# EAGLE board fbri_flight_straight (EAGLE 6.6.0)
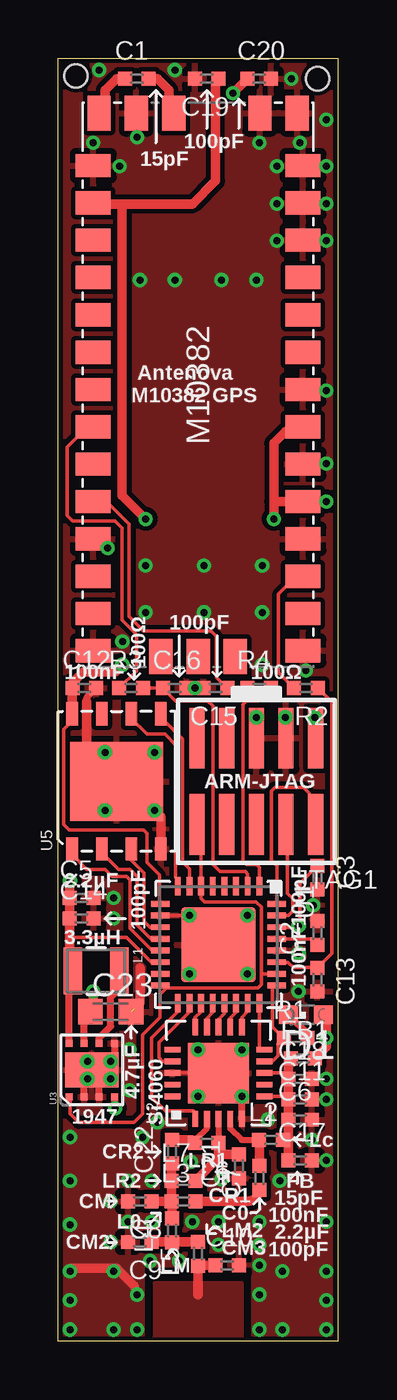
[diagram p0: board, top side]
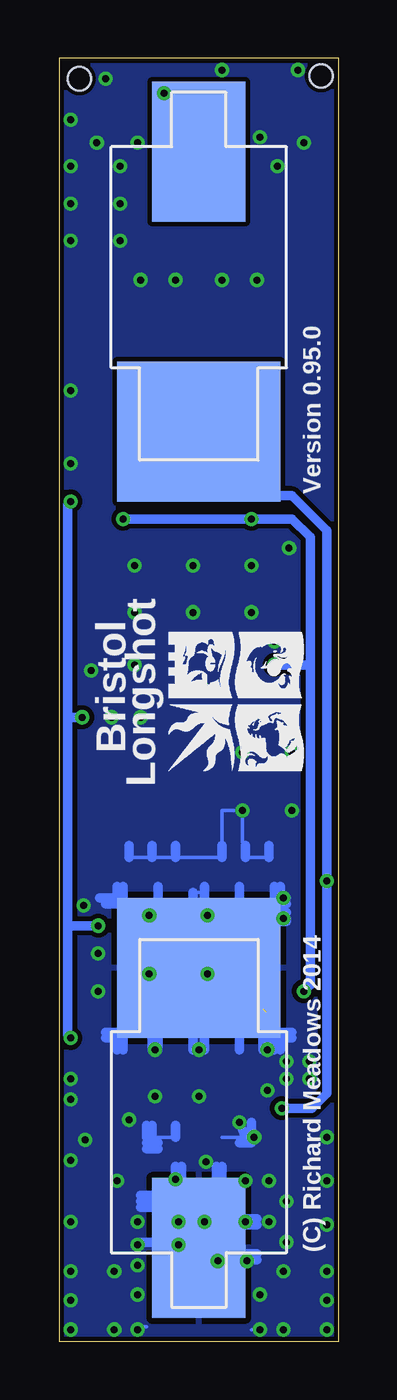
[diagram p1: board, bottom side, seen from below]

Size 12 x 55 mm. Coordinates in mm from the lower left corner, seen from the top.
Outline: 0,0 0,55 12,55 12,0 0,0
Copper layers (1*16): Top 0.035mm / dielectric 1.5mm / Bottom 0.035mm
Design rules "hackvana": minimum track width 6mil, minimum drill 0.3mm, track to track 6mil, track to pad 6mil, pad to pad 6mil, via to via 6mil, smd to smd 0mil, copper to edge 6mil, drill to drill 6mil, minimum pad ring 10mil, minimum via ring 6mil, stop-mask expansion 2mil, vias tented up to drill 100mil, thermal gap 10mil
Holes 1 mm at 11.12,54.12 0.75,54.25

## Footprints (pad centres in the part's own frame; a part is rotated, then mirrored left to right if it is on the bottom)
_0402 = smd 0.6 x 0.6: 1 -0.508,0; 2 0.508,0
C0603K = smd 1.05 x 1.08: 1 -0.875,0; 2 0.875,0
CHIPLED_0603 = smd 0.8 x 0.8: A 0,-0.75; C 0,0.75
2X05_1.27MM_SMT = smd 0.65 x 2.6: 1 -2.54,-1.85; 2 -2.54,1.85; 3 -1.27,-1.85; 4 -1.27,1.85; 5 0,-1.85; 6 0,1.85; 7 1.27,-1.85; 8 1.27,1.85; 9 2.54,-1.85; 10 2.54,1.85
1007 = smd 2 x 0.8: 1 0,1; 2 0,-1
QFN32_5MM = smd 0.8 x 0.25: 1 -2.5,1.75; 2 -2.5,1.25; 3 -2.5,0.75; 4 -2.5,0.25; 5 -2.5,-0.25; 6 -2.5,-0.75; 7 -2.5,-1.25; 8 -2.5,-1.75; 17 2.5,-1.75; 18 2.5,-1.25; 19 2.5,-0.75; 20 2.5,-0.25; 21 2.5,0.25; 22 2.5,0.75; 23 2.5,1.25; 24 2.5,1.75 | smd 0.25 x 0.8: 9 -1.75,-2.5; 10 -1.25,-2.5; 11 -0.75,-2.5; 12 -0.25,-2.5; 13 0.25,-2.5; 14 0.75,-2.5; 15 1.25,-2.5; 16 1.75,-2.5; 25 1.75,2.5; 26 1.25,2.5; 27 0.75,2.5; 28 0.25,2.5; 29 -0.25,2.5; 30 -0.75,2.5; 31 -1.25,2.5; 32 -1.75,2.5 | smd 3.2 x 3.2: 33 0,0
QFN20 = smd 0.7 x 0.25: 1 -1.97,1; 2 -1.97,0.5; 3 -1.97,0; 4 -1.97,-0.5; 5 -1.97,-1; 11 1.97,-1; 12 1.97,-0.5; 13 1.97,0; 14 1.97,0.5; 15 1.97,1 | smd 0.25 x 0.7: 6 -1,-1.97; 7 -0.5,-1.97; 8 0,-1.97; 9 0.5,-1.97; 10 1,-1.97; 16 1,1.97; 17 0.5,1.97; 18 0,1.97; 19 -0.5,1.97; 20 -1,1.97 | smd 2.6 x 2.6: PAD 0,0
TDFN8 = smd 0.3 x 0.3: 1 -1.15,0.975; 2 -1.15,0.325; 3 -1.15,-0.325; 4 -1.15,-0.975; 5 1.15,-0.975; 6 1.15,-0.325; 7 1.15,0.325; 8 1.15,0.975 | smd 1.5 x 2.3: PAD 0,0
ANTENOVA_GPS_M10382 = smd 1 x 1.5: 1_ANT_IN -1.05,11.65; 2_GND -2.65,11.65; 3_ANT_OUT -4.25,11.65; 18_SDA -1.6,-11.65; 19_SCL 0,-11.65; 20_SAFEBOOT_N/TDI 1.6,-11.65; 35_GND 4.25,11.65; 36_GND 2.65,11.65 | smd 1.5 x 1: 4_GND -4.5,9.4; 5_VIO -4.5,7.8; 6_USB_DP -4.5,6.2; 7_USB_DM -4.5,4.6; 8_SO -4.5,3; 9_CFG_GPS0_SCK -4.5,1.4; 10_SPI_SELECT -4.5,-0.2; 11_TX -4.5,-1.8; 12_V_TH -4.5,-3.4; 13_RX -4.5,-5; 14_GND -4.5,-6.6; 15_V_BCKUP -4.5,-8.2; 16_SI -4.5,-9.8; 17_GND -4.5,-11.4; 21_GND 4.5,-11.4; 22_TCK 4.5,-9.8; 23_TIMEPULSE/TDO 4.5,-8.2; 24_GND 4.5,-6.6; 25_VDD_RF 4.5,-5; 26_GND 4.5,-3.4; 27_VCC 4.5,-1.8; 28_GND 4.5,-0.2; 29_EXT_INTERRUPT 4.5,1.4; 30_V_EN 4.5,3; 31_CFG 4.5,4.6; 32_VDD_USB 4.5,6.2; 33_GND 4.5,7.8; 34_GND 4.5,9.4
WSON8 = smd 1 x 0.5: 1 -2.9,1.905; 2 -2.9,0.635; 3 -2.9,-0.635; 4 -2.9,-1.905; 5 2.9,-1.905; 6 2.9,-0.635; 7 2.9,0.635; 8 2.9,1.905 | smd 3.4 x 4: PAD 0,0
AA = smd 4 x 6: +1 0,23.5; -1 0,-23.5 | smd 7 x 6: +2 0,11.5; -2 0,-11.5

## Placement (x,y rotation side)
C1  15pF  [_0402]  3.38,54.12 0 top
C2  100nF  [_0402]  11.12,17.5 90 top
C3  100nF  [_0402]  11.12,19.88 270 top
C5  2.2µF  [_0402]  1,19 0 top
C6  2.2µF  [_0402]  10.38,9.5 0 top
C7  15pF  [_0402]  8.62,7 90 top
C8  8.2pF  [_0402]  3.5,6 180 top
C9  15pF  [_0402]  3.5,4.25 180 top
C10  8.2pF  [_0402]  7.25,3.25 0 top
C11  100nF  [_0402]  10.38,10.38 0 top
C12  100nF  [_0402]  1.12,28 0 top
C13  100pF  [_0402]  11.12,15.5 270 top
C14  100pF  [_0402]  1,18.12 0 top
C15  100pF  [_0402]  6.75,28 180 top
C16  100pF  [_0402]  5,28 0 top
C17  100pF  [_0402]  10.38,7.75 0 top
C18  15pF  [_0402]  10.38,11.25 0 top
C19  100pF  [_0402]  6.38,54.12 180 top
C20  100pF  [_0402]  8.62,54.12 0 top
C21  15pF  [_0402]  7.75,7.5 90 top
C22  DNP  [_0402]  4.88,8.12 90 top
C23  4.7µF  [C0603K]  2.25,14.12 0 top
D1  GREEN  [CHIPLED_0603]  10.62,14 90 top
FB1  [_0402]  10.5,12.12 0 top
JTAG1  [2X05_1.27MM_SMT]  8.5,24 180 top
L1  3.3µH  [1007]  1.62,15.88 270 top
L2  220nH  [_0402]  9.12,8.62 0 top
L3  56nH  [_0402]  5.38,6 0 top
L4  18nH  [_0402]  4.88,4.75 90 top
L5  18nH  [_0402]  6,3.75 90 top
L6  DNP  [_0402]  6.38,8.5 180 top
L7  DNP  [_0402]  5.38,6.88 0 top
R1  22Ω  [_0402]  10.19,13 0 top
R2  100Ω  [_0402]  10.62,28 180 top
R3  100Ω  [_0402]  3.12,28 0 top
R4  100Ω  [_0402]  8.62,28 0 top
U1  SAM_D20E  [QFN32_5MM]  6.88,17 270 top
U2  SI4060  [QFN20]  6.88,11.5 90 top
U3  MAX1947  [TDFN8]  1.44,11.62 90 top
U4  ANTENOVA_GPS_M10382  [ANTENOVA_GPS_M10382]  6,41 0 top
U5  S25FS-S  [WSON8]  2.5,24 90 top
U$2  AA_HOLDER  [AA]  6,27.5 0 bottom

## Library data of the parts
C1-C3 C5-C22 FB1 JTAG1 L2-L7 R1-R4 = microbuilder_v3
C23 = resistor
D1 = led
L1 = SparkFun
U1-U5 U$2 = fbri

## Nets
1.2V: C5.1 C14.1 L1.2 U1.14 U3.4 U3.8 U$2.+2
1.8V: C3.1 C12.1 C19.1 C23.1 D1.A FB1.2 JTAG1.1 U1.9 U1.30 U3.7 U4.5_VIO U4.25_VDD_RF U4.27_VCC U5.8
AN_GPS_RX: C15.1 R4.1 U4.13_RX
AN_GPS_TX: R3.1 U4.11_TX
ANT: C10.1 L5.1
FILTER1: C8.1 C22.1 L3.1 L4.2 L7.1
FILTER2: C9.1 L4.1 L5.2
GND: C2.2 C3.2 C5.2 C6.2 C8.2 C9.2 C10.2 C11.2 C12.2 C13.2 C14.2 C15.2 C16.2 C17.2 C18.2 C19.2 C20.2 C21.1 C23.2 JTAG1.3 JTAG1.5 U1.10 U1.28 U1.33 U2.5 U2.18 U2.PAD U3.2 U3.3 U3.5 U3.PAD U4.2_GND U4.4_GND U4.14_GND U4.17_GND U4.21_GND U4.24_GND U4.26_GND U4.28_GND U4.32_VDD_USB U4.33_GND U4.34_GND U4.35_GND U4.36_GND U5.4 U5.PAD U$2.-1 U$2.-2
GPS_ANT_IN: C1.2 U4.1_ANT_IN
GPS_ANT_OUT: C1.1 U4.3_ANT_OUT
GPS_RX: R4.2 U1.1
GPS_TX: C16.1 R3.2 U1.2
LED_RES: D1.C R1.2
LX: L1.1 U3.6
MEM_CSN: U1.13 U5.1
MEM_MISO: U1.12 U5.2
MEM_MOSI: U1.7 U5.5
MEM_SCK: U1.8 U5.6
MEM_WPN: U1.11 U5.3
N$1: C20.1 U$2.+1
RADIO_VDD: C6.1 C11.1 C17.1 C18.1 FB1.1 L2.2 U2.6 U2.8
RESETN: JTAG1.10 U1.6 U1.16 U1.26 U3.1
RF_OUT: C7.2 L2.1 U2.4
RXN: C21.2 L6.1 L7.2 U2.3
RXP: C22.2 L6.2 U2.2
SI_GPIO0: R1.1 U1.25 U2.9
SI_GPIO1: U1.24 U2.10
SI_HF_CLK: U1.18 U2.17
SI_MISO: U1.21 U2.13
SI_MOSI: U1.20 U2.14
SI_NIRQ: U1.23 U2.11
SI_NSEL: U1.19 U2.15
SI_SCLK: U1.22 U2.12
SI_SDN: U1.17 U2.1
SWDCLK: JTAG1.4 U1.31
SWDIO: JTAG1.2 U1.32
TANK: C7.1 L3.2
TIME_1KHZ: C13.1 R2.1 U1.27
TIME_1KHZ_DRIVE: R2.2 U4.23_TIMEPULSE/TDO
VDD_CORE: C2.1 U1.29

## Tracks (layer width: path | path; a pad name or v marks a point on that pad's centre or on a via)
1.2V  (via drill 0.3)
  Top 0.152: U1.14 4,16.25 2.94,17.31 0.49,17.31
  Top 0.305: L1.2 0.38,15.62 0.38,15.5 0.5,15.38 0.46,15.34 U3.8 | U3.4 2.41,10.01 v2.44,9.98
  Top 0.406: L1.2 0.49,15.76 0.49,17.31 C14.1 C5.1 v0.49,19.73 v0.5,19.73
  Bottom 0.406: U$2.+2 5.5,39 2.75,36.25 2,36.25 0.5,34.75 v0.5,19.73 0.5,10.62 1.14,9.98 v2.44,9.98
1.8V  (via drill 0.3)
  Top 0.152: U1.30 10.25,17.75 v10.31,17.81 10.36,17.86 10.36,19.62 C3.1 | U5.8 0.59,26.59 0.23,26.23 0.23,22.14 0.46,21.92 3.66,21.92 3.81,21.76 3.81,20.52 4.34,19.99 4.34,18.72 U1.9 | U4.5_VIO 1.2,48.8
  Top 0.305: U3.7 1.11,13.89 C23.1
  Top 0.406: FB1.2 11.5,12.62 v11.5,13 11.5,13.88 D1.A | U5.8 0.59,27.98 C12.1 0.62,28.25 1.07,28.7 2.45,28.7 v2.75,29 | U4.5_VIO 1.92,48.8 | 10.75,36 U4.25_VDD_RF | JTAG1.1 11.04,26.71 v11,26.75 | U4.25_VDD_RF v11.5,36 | v3.75,35.25 2.74,36.26 2.74,48.74 1.56,48.74 U4.5_VIO | U4.27_VCC 10.3,39 9.75,39 9.25,38.5 9.25,36 | 9.25,36 v9.25,35.25 | U4.25_VDD_RF 9.25,36 | C19.1 6.75,53.99 6.75,49.75 5.75,48.75 1.55,48.75 U4.5_VIO | v1.5,15 1.5,14.12 C23.1
  Bottom 0.406: v2.75,29 1.22,29 | 1.22,29 1.22,15.28 v1.5,15 | 1.22,29 1.22,34.47 2,35.25 v3.75,35.25 v9.25,35.25 | 11.62,26.75 11.62,35.88 v11.5,36 | 11.62,26.75 11.62,17.81 | 11.62,17.81 11.62,13.12 v11.5,13 | v11,26.75 11.62,26.75 | v10.31,17.81 11.62,17.81
AN_GPS_RX
  Top 0.152: U4.13_RX 2.07,36 3.05,35.02 3.05,31.06 3.66,30.44 6.55,30.44 6.78,30.21 6.78,28.46 7.24,28 C15.1 R4.1
AN_GPS_TX
  Top 0.152: 1.29,39.2 U4.11_TX 1.23,39.2 0.38,38.34 0.38,35.4 0.61,35.17 2.44,35.17 2.74,34.86 2.74,30.91 3.35,30.3 3.35,28.74 R3.1
ANT
  Top 0.406: 6.38,3.25 C10.1 L5.1 6,2
  pour Top: 4.12,0 7.88,0 7.88,2.5 4.12,2.5
FILTER1
  Top 0.406: C22.1 4.87,7.62 L7.1 L3.1 | L3.1 L4.2 | C8.1 L3.1
FILTER2
  Top 0.406: C9.1 4.88,4.26 | 4.88,4.26 L5.2 | L4.1 4.88,4.26
GND  (via drill 0.3)  (1 unrouted)
  Top 0.152: U1.10 v5.62,18.25 U1.33 6.88,18.25 v8.12,18.25 | U2.18 5.62,11.5 5.88,11.25 | U5.PAD 1.25,22.75 | C12.2 1.25,27.62 1.25,25.25 v2,25.25 v4.12,25.25
  Top 0.305: 5.88,11.25 v6,10.5 | U2.5 v7.88,10.5 | C12.2 1.22,27.59 1.22,27.43 | U3.2 1.11,11.62 U3.PAD | U3.5 2.41,12 v2.25,12 | U3.3 1.76,11.24 1.75,11.25 v1.25,11.25
  Top 0.406: U5.4 4.41,22.47 v4.12,22.75 | 0.5,3.12 2.5,3.12 3.25,2.38 | 1.22,27.43 1.22,24.96 2.18,24 U5.PAD | 3.38,14 C23.2 | 3.5,16 3.5,14.5 3.25,14.25
  Bottom 0.152: 4,21.25 4.12,21.38 v4.12,22.75 5,22.75 5,21.25 | 4,20.75 3,20.75 | 5,20.75 7,20.75 8,20.75 9,20.75 | 8,8.75 8.25,8.75 8.25,8.5 8.25,8.25 | 7.75,8.5 7.75,8.75 7,8.75 | 5,8.75 4.25,8.75 4.25,8.5 | 4,8.75 3.75,8.75 3.75,8.5 | v3.38,0.5 3.75,0.5 | 8.25,0.62 8.62,0.62 v8.62,0.5 | 5.75,19.5 5.75,19.25 6.25,19.25 | 2.25,18.38 2.25,18.25 v2.38,18.12
  Bottom 0.406: 7,8.75 7,9.25 | 8,8.75 8,9.25 | 8.25,8.5 7.75,8.5 | 8.25,9.25 8.25,8.75 | 4,8.75 v4.25,9.38 | 4.25,8.5 3.75,8.5 | 3.75,9.38 3.75,8.75 | 8.25,8.25 7.75,8.25 | 5,20.75 5,21.25 | 4,20.75 4,21.25 | 3,20.75 3,21.25 | 7,20.75 7,21.25 | 8,20.75 8,21.25 | 9,20.75 9,21.25 | 5.25,6.75 5.25,7.5 | 5,6.75 5,7.5 | 4.5,5 3.5,5 | 4.25,5.25 3.5,5.25 | 8.5,5.75 7.75,5.75 | 8.5,6 7.75,6 | 8.5,6.25 7.75,6.25 | 4.25,3.75 3.5,3.75 | 4.25,3.5 3.5,3.5 | 8.5,4.25 7.75,4.25 | 5.75,13.25 5.75,12.5 | 6.25,13.25 6.25,12.5 | 5.75,19.5 5.75,18.75 | 6.25,19.25 6.25,18.5 | 2.25,18.75 2.75,18.75 | 2.75,18.75 3,18.75 | 2.5,19.5 2.5,19 | 2.5,19 2.5,18.75 | 2.25,19 2.5,19 | 2.75,18.75 2.75,19.5 | 9.25,19.5 9.25,18.75 10,18.75 | 9.5,19.5 9.5,19 | 9.5,19 9.5,18.75 | 9.5,19 10.25,19 | 4.25,19.5 4.25,18.75 | 7.75,19.5 7.75,18.75 | 7.75,13.25 7.75,12.5 | 4.25,13.25 4.25,12.5 | 9.25,13 9.25,13.25 10,13.25 | 9.25,13 9.25,12.5 | 9.5,13.25 9.5,12.5 | 9.25,13 10,13 | 6.75,6.75 6.75,7.5 | 7,7.5 v7,6.94 7,6.75 | 2.25,18 2.75,18 2.88,18.12 v2.38,18.12 2.25,18.12 | 2.25,18.38 2.75,18.38 | 3.25,13.25 3.25,12.5 | 3,13.25 3,12.5 | 2.75,13 2.75,13.25 2.5,13.25 | 2.75,13 2.75,12.5 | 2,13.25 2.5,13.25 | 2,13 2.75,13 | 2.5,12.5 2.5,13.25 | 8,13.25 8,12.5
  other vias: 8.5,26.75 9.75,26.75 5.62,15.75 6,12.5 7.88,12.5 10.94,18.69 10.31,16.62 5.88,28 10.31,15 11.5,11.25 11.5,10.38 9,9.5 0.5,3 0.5,1.75 0.5,0.5 2.38,0.5 3.38,2 2.38,3 9.62,0.5 11.5,0.5 11.5,1.75 11.5,3 9.62,3 8.62,2 11.5,40.75 2.75,30 2.38,19 8.75,29 8.75,31.25 8.75,33.25 3.75,33.25 3.75,31.25 6.25,31.25 5,45.5 3.5,45.5 7,45.5 8.5,45.5 2,22.75 9.38,47.17 9.38,48.77 11.5,50.38 3.38,51.62 2.62,50.38 8.62,51.38 10.38,51.38 1.75,54.5 11.5,52.38 10,54.12 8.62,3.25 5.69,7.69 11.5,48.77 9.38,50.38 11.5,47.17 0.5,5 0.5,6.88 0.5,8.75 11.5,5.12 4,5.12 2.25,4.25 8.62,5.12 9.5,6.88 6.25,33.25 8.12,15.75 2.12,34 10.62,28.75 1.5,51.38 5,54.5 2.25,6 3,5.12 5.75,5.12 8.62,4.12 6.88,4.12 6.88,5.12 11.5,7.75 10.88,8.62 3,6.88 4,6.88 5.19,3.44 3.94,3.44 11.5,37.62 1.25,12 2.25,11.25 3.06,10.75 3.06,12.5 3.62,8.75
  pour Top (isolate 0.2): 0,55 12,55 12,0 8.38,0 8.38,3.25 3.62,3.25 3.62,0 0,0
  pour Bottom (isolate 0.2): 0,55 12,55 12,0 0,0
GPS_ANT_IN
  Top 0.4: C1.2 4.25,54.12 4.75,53.62 4.75,52.85 U4.1_ANT_IN
GPS_ANT_OUT
  Top 0.4: C1.1 2.5,54.12 2,53.62 2,52.9 U4.3_ANT_OUT
GPS_RX
  Top 0.152: U1.1 8.62,20.3 8.49,20.44 8.08,20.44 7.92,20.59 7.92,27.3 8.08,27.45 8.58,27.45 R4.2
GPS_TX
  Top 0.152: U1.2 8.12,20.04 8.03,20.14 6.93,20.14 6.63,20.44 6.63,27.22 6.4,27.45 5.04,27.45 C16.1 R3.2
LED_RES
  Top 0.305: R1.2 10.75,13.01 10.75,13.12 D1.C
LX
  Top 0.305: L1.1 2.62,15.12 2.25,14.75 2.25,13.5 1.76,13.01 U3.6
MEM_CSN
  Top 0.152: U1.13 4.02,16.75 3.08,17.7 3.08,19.78 2.92,19.93 2.31,19.93 2.01,20.23 1.22,20.23 0.59,20.86 U5.1
MEM_MISO
  Top 0.152: U1.12 3.98,17.25 3.38,17.85 3.38,19.93 3.08,20.23 2.59,20.23 1.86,20.96 U5.2
MEM_MOSI
  Top 0.152: U5.5 4.42,26.63 4.52,26.63 5.33,25.82 5.33,20.54 5.62,20.25 U1.7
MEM_SCK
  Top 0.152: U5.6 3.13,26.7 3.81,26.02 4.57,26.02 5.03,25.57 5.03,19.89 5.12,19.79 U1.8
MEM_WPN
  Top 0.152: U1.11 3.94,17.75 3.69,18 3.69,20.08 3.13,20.63 U5.3
N$1  (via drill 0.3)
  Top 0.406: C20.1 v7.5,53.5
  Bottom 0.406: U$2.+1 v7.5,53.5
RADIO_VDD
  Top 0.152: U2.8 9.87,11.5 C18.1 C11.1 9.88,10.49 9.87,10.5 U2.6
  Top 0.406: FB1.1 9.87,12 C18.1 9.87,10.5 C11.1 C6.1 9.87,8.62 | 9.87,8.62 C17.1 | L2.2 9.87,8.62
RESETN
  Top 0.152: U1.26 8.75,15.75 8.71,15.72 | 8.71,15.72 8.71,15.3 8.56,15.14 4.64,15.14 | 8.71,15.72 8.71,18.61 8.49,18.84 6.28,18.84 6.12,18.99 U1.6 | U1.6 | JTAG1.10 6,21.86 6,21 6.12,20.88 U1.6 | U1.16 4.69,15.25 4.64,15.21 4.64,15.14 | U3.1 0.5,10.44 0.5,9.75 0.88,9.38 3.25,9.38 3.62,9.75 3.62,13.12 4.38,13.88 4.38,14.88 4.64,15.14
RF_OUT
  Top 0.254: U2.4 7.38,9.12 7.88,8.62 L2.1 8.68,8.75
  Top 0.406: L2.1 8.62,8.69 C7.2
RXN
  Top 0.254: U2.3 L6.1
  Top 0.406: L7.2 6.88,7.88 | 6.88,7.88 L6.1 | C21.2 7.01,8.01 6.88,7.88
RXP
  Top 0.254: U2.2 6.38,9.13 5.88,8.63 | 5.88,8.63 L6.2 | 5.88,8.63 L6.2
  Top 0.406: C22.2 5.73,8.63 L6.2
SI_GPIO0
  Top 0.152: U2.9 9.19,12 9.42,12.24 9.42,12.74 R1.1 9.2,13.48 9.2,15.22 U1.25
SI_GPIO1
  Top 0.152: U1.24 8.62,12.5 U2.10
SI_HF_CLK
  Top 0.152: U2.17 4.48,12 4.32,12.16 4.32,12.82 5.62,14.12 U1.18
SI_MISO
  Top 0.152: U1.21 7.12,14.05 6.88,13.8 U2.13
SI_MOSI
  Top 0.152: U1.20 6.62,14.09 6.38,13.84 U2.14
SI_NIRQ
  Top 0.152: U1.23 8.12,14.14 7.88,13.89 U2.11
SI_NSEL
  Top 0.152: U1.19 6.12,14.12 5.88,13.87 U2.15
SI_SCLK
  Top 0.152: U1.22 7.62,14.1 7.38,13.85 U2.12
SI_SDN
  Top 0.152: 5.88,9.72 U2.1 5.88,9.81 5.81,9.88 4.6,9.88 4.01,10.46 4.01,13.01 5.12,14.12 U1.17
SWDCLK
  Top 0.152: JTAG1.4 9.77,21.13 9.83,21.07 9.83,19.2 10.06,18.97 10.06,18.44 9.87,18.25 U1.31
SWDIO
  Top 0.152: 9.36,18.76 U1.32 9.38,20.39 9.14,20.62 9.14,23.59 9.3,23.74 10.52,23.74 11.04,23.21 JTAG1.2
TANK
  Top 0.406: C7.1 arc-90 8.13,6 L3.2
TIME_1KHZ
  Top 0.152: U1.27 9.86,16.25 10.09,16.02 11.11,16.02 C13.1 11.73,16.62 11.73,27.4 R2.1
TIME_1KHZ_DRIVE
  Top 0.152: U4.23_TIMEPULSE/TDO 10.23,32.8 9.45,32.02 9.45,28.67 R2.2
VDD_CORE
  Top 0.152: U1.29 10.87,17.25 C2.1

## Text on the board
tPlace: 100pF | 15pF | Antenova / M10382 GPS | 100pF | 100Ω | 100nF | 100Ω | ARM-JTAG | 100nF100pF | 2.2µF | 100pF | 3.3µH | 4.7µF | 1947 | Si4060 | CR2 | Lc | LR2 | LR1 | CM | CR1 | L0 | C0 | CM2 | CM3 | LM2 | FB / 15pF / 100nF / / 100pF | 2.2µF | LM
bPlace: Version 0.95.0 | Longshot | Bristol | (C) Richard Meadows 2014
mfgcode.gbo: XxXxXxXxXxXx